# Altium PCB TIDM_TM4C129CAMERA.PcbDoc
Units mil, origin at the board's own origin, x right, y up, seen from the top; angles counter-clockwise.
Board outline 1800 x 2000 mil, 4 copper layers (Component Side, Ground Plane, Power Plane, Solder Side), stack 59.6 mil thick; 19 components, 33 nets, 138 pads, 33 vias.
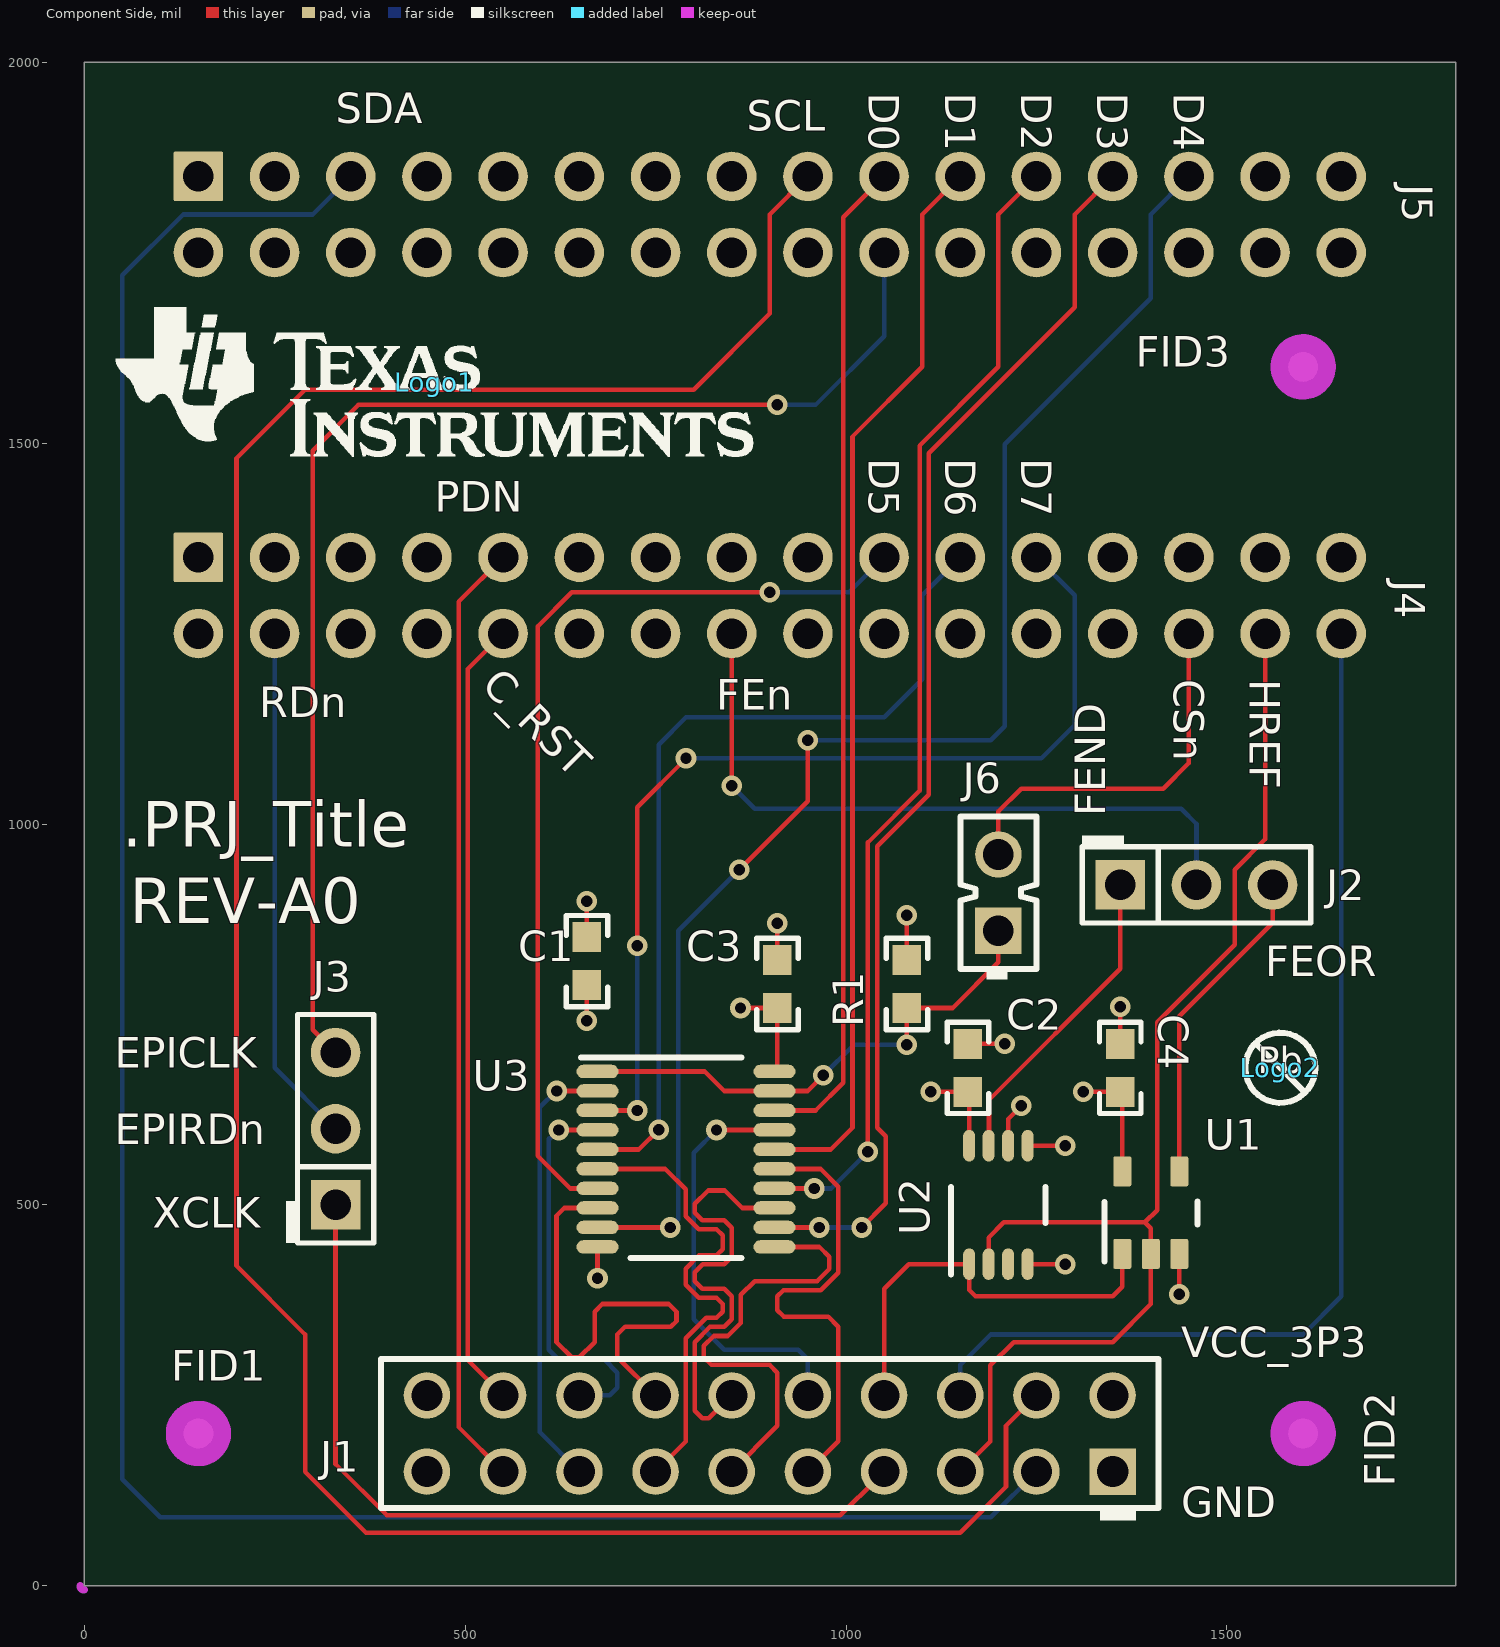
[diagram p0: Component Side view]
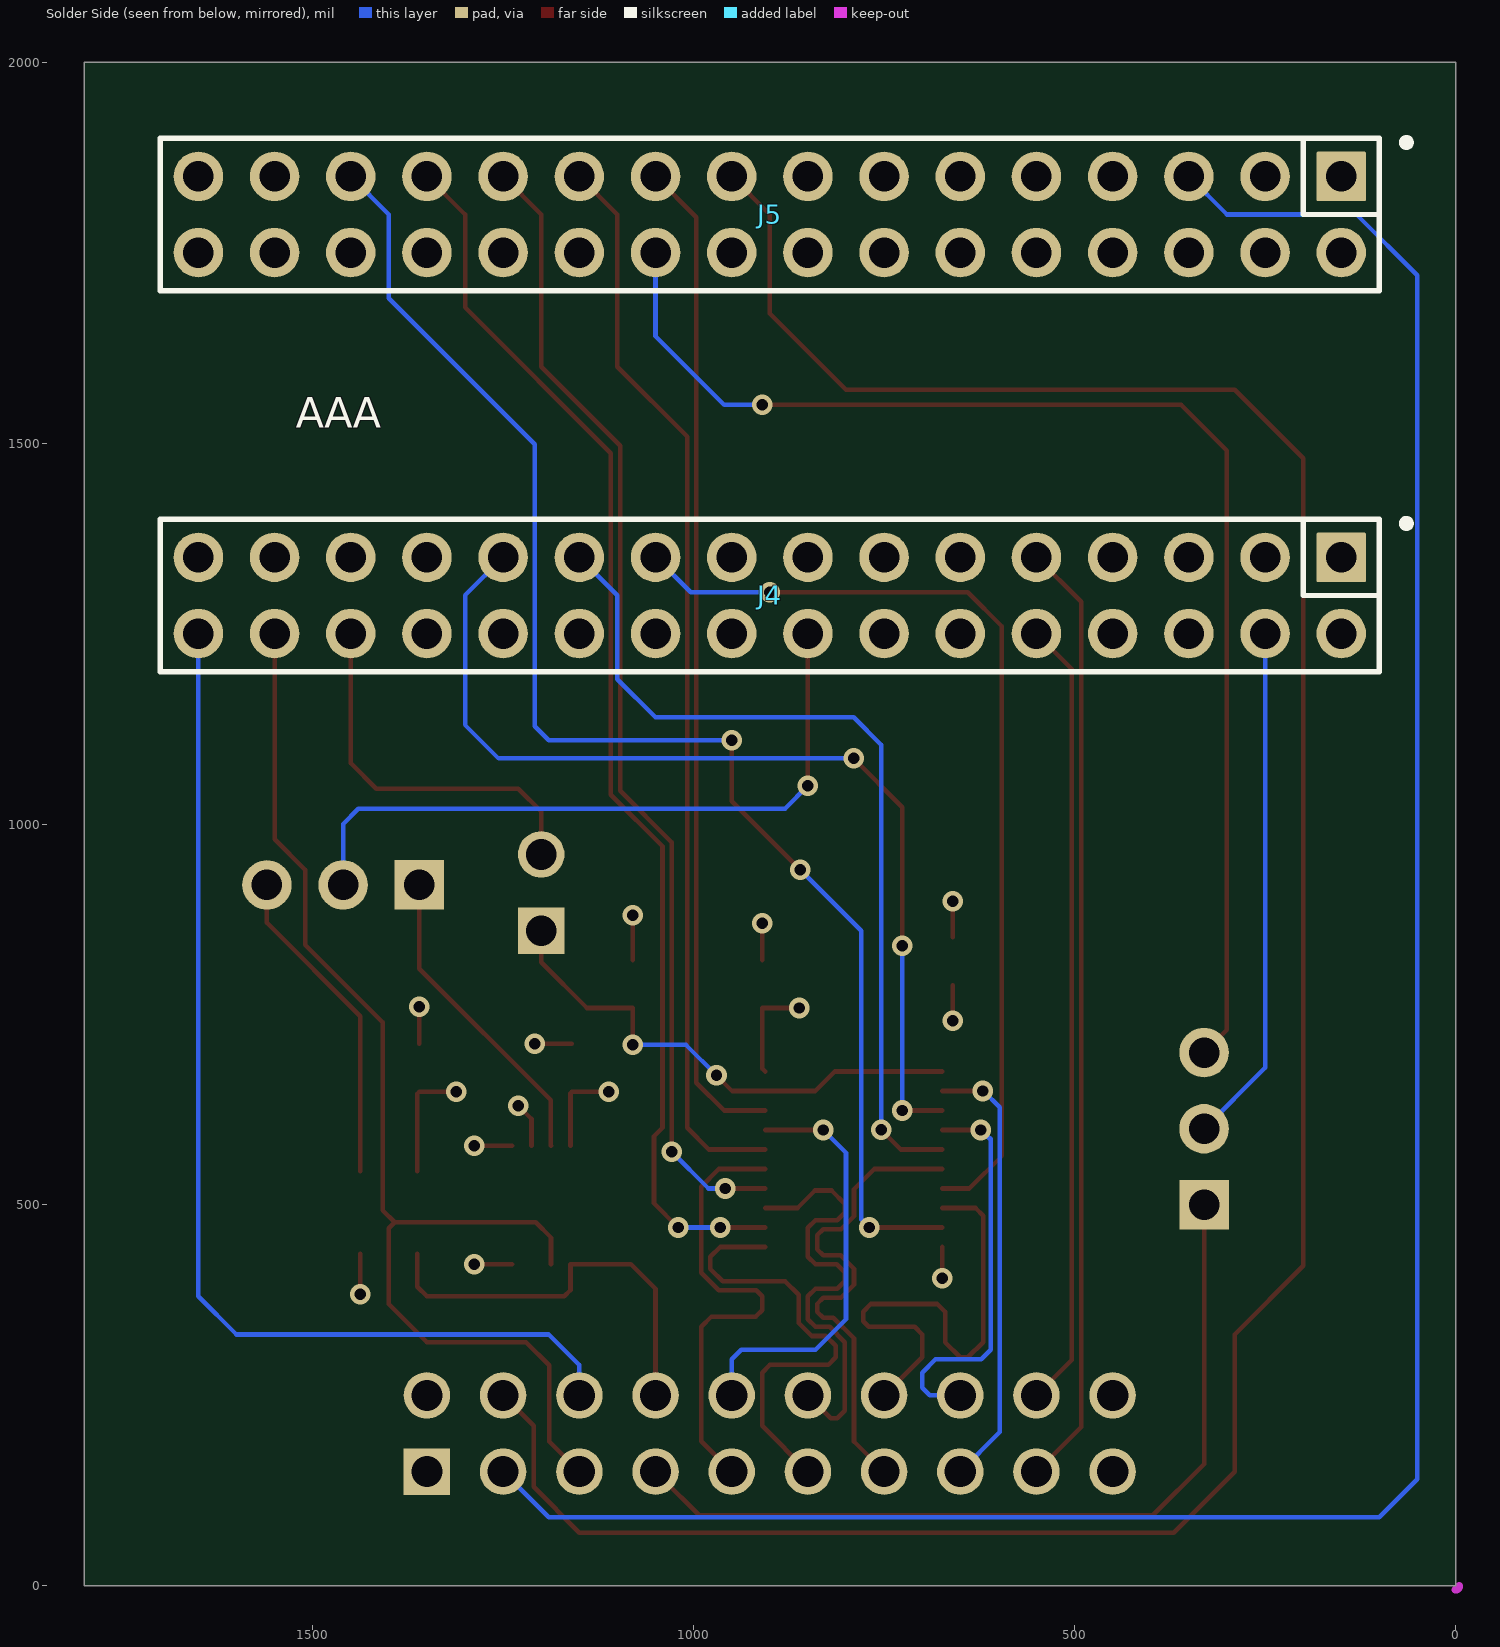
[diagram p1: Solder Side view, seen from below]
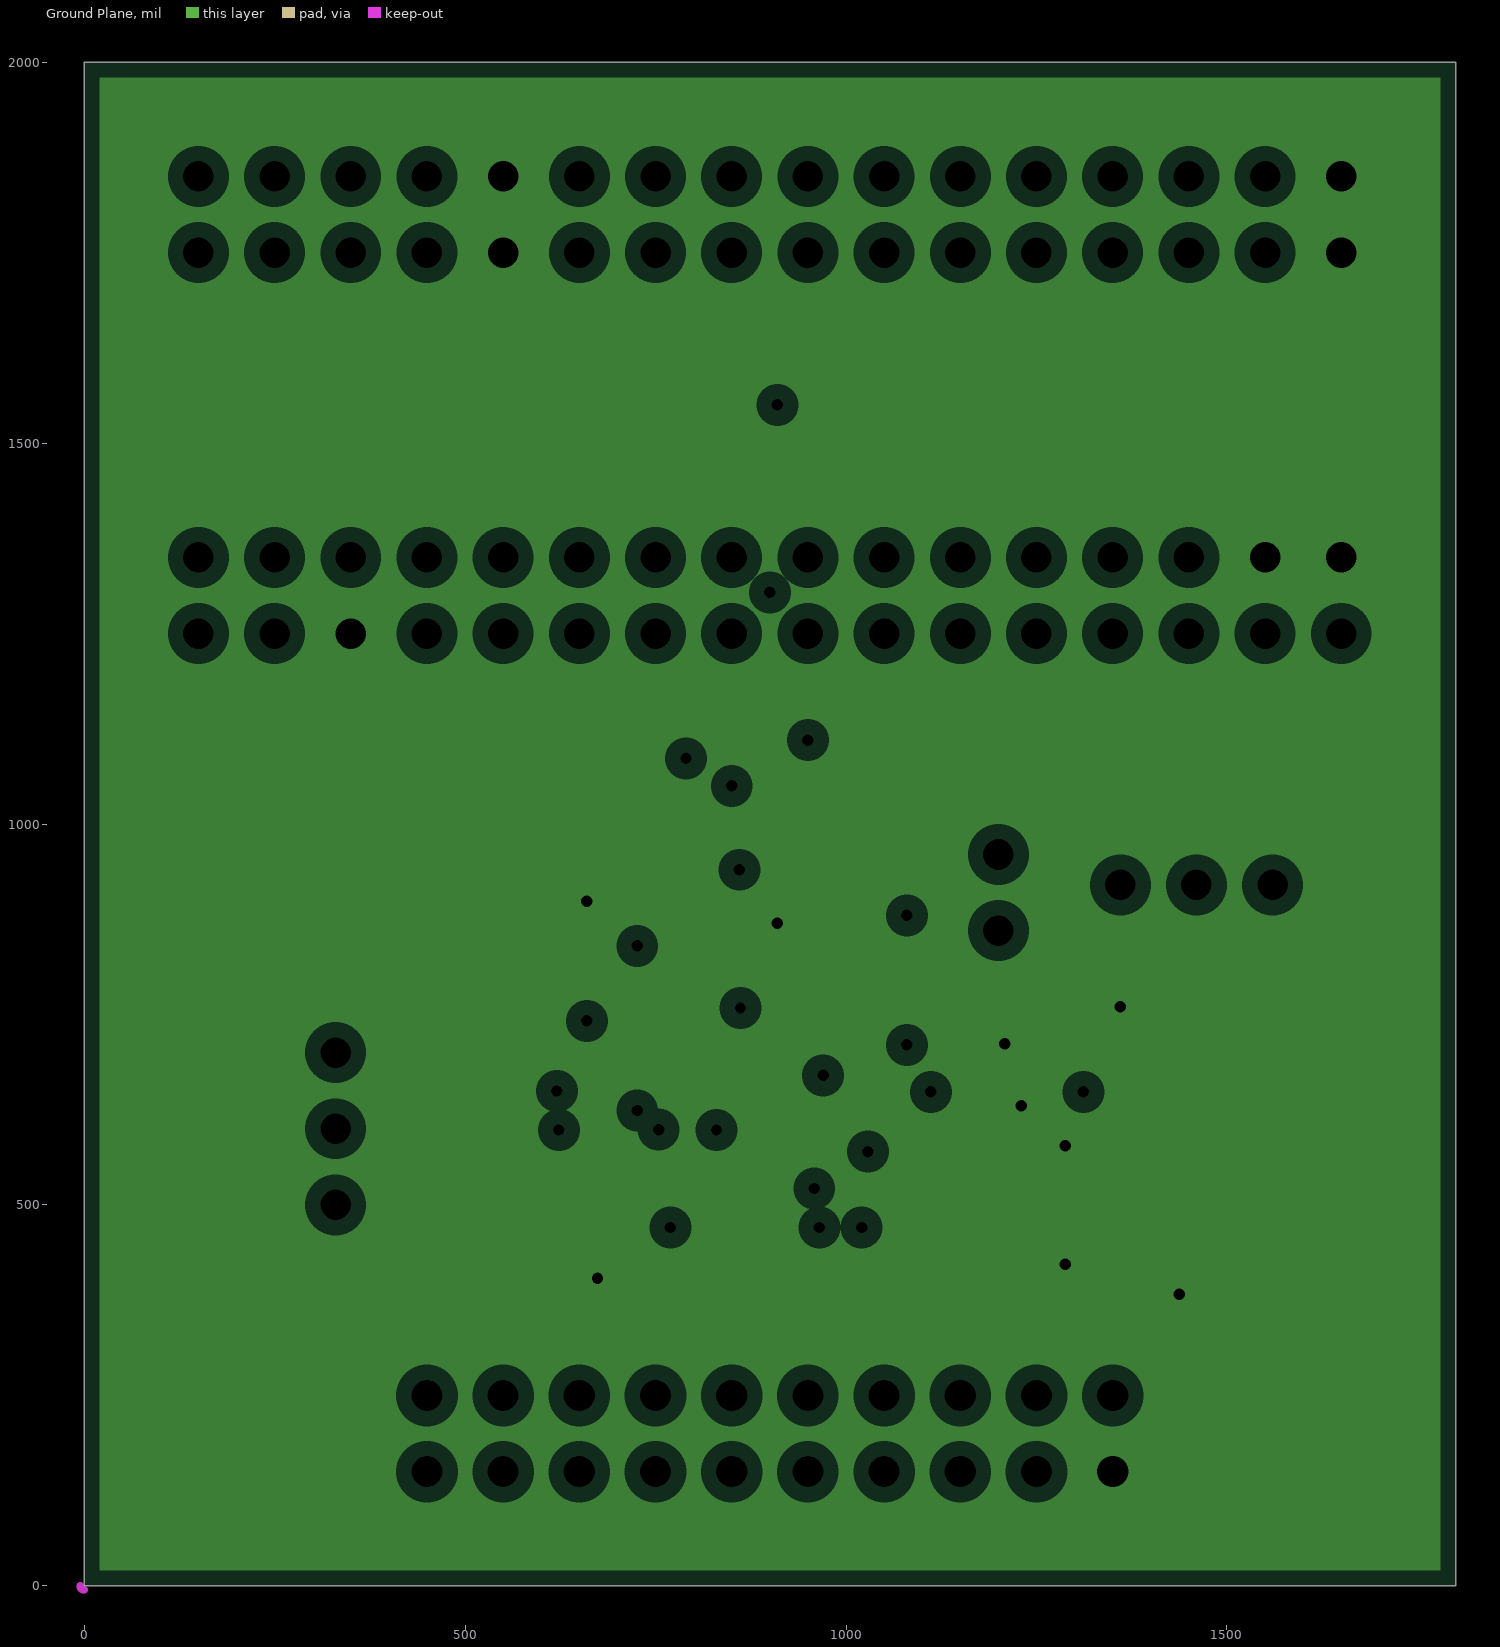
[diagram p2: Ground Plane, clearances drawn from the general rule]
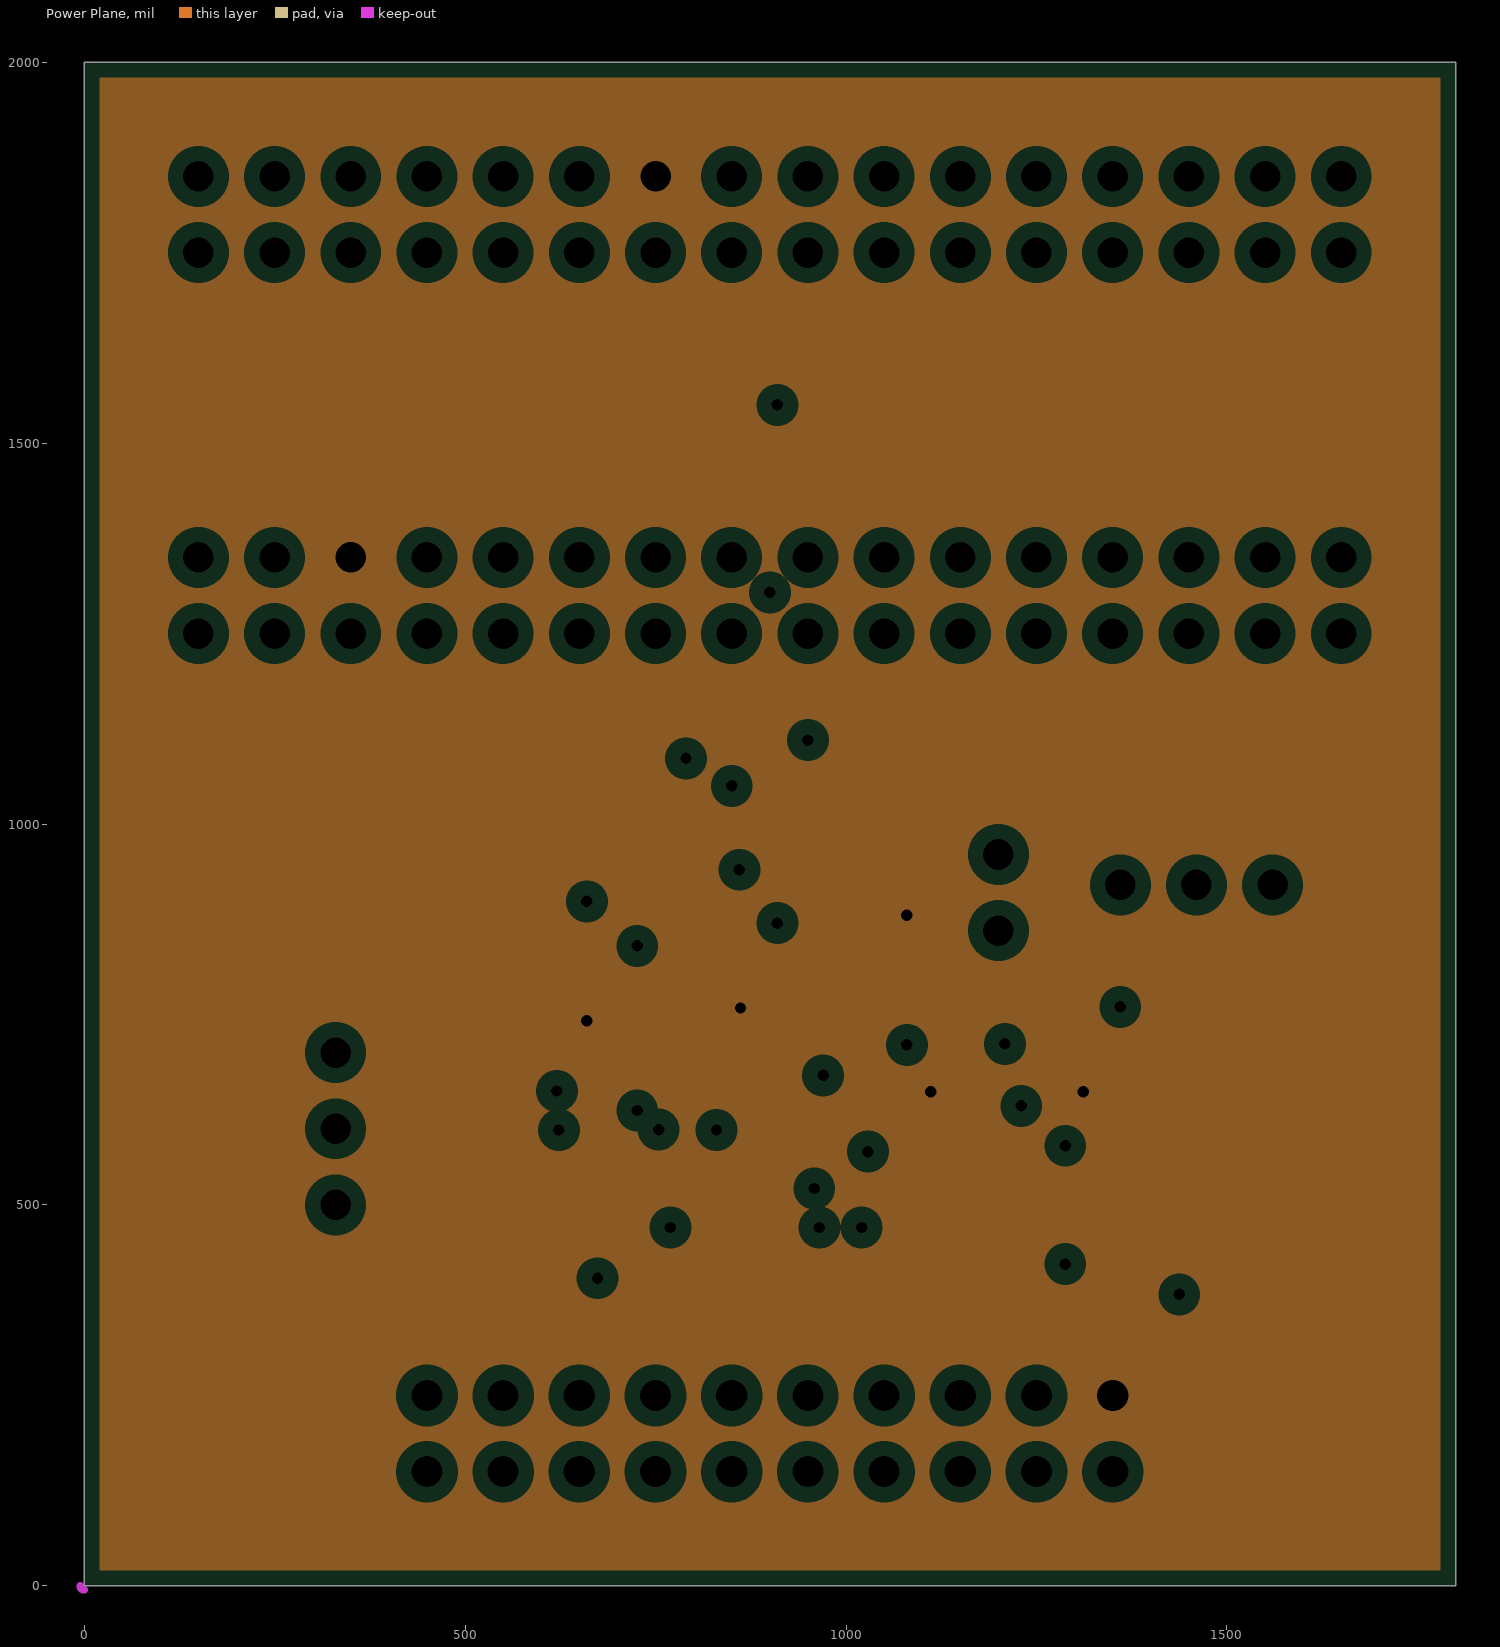
[diagram p3: Power Plane, clearances drawn from the general rule]
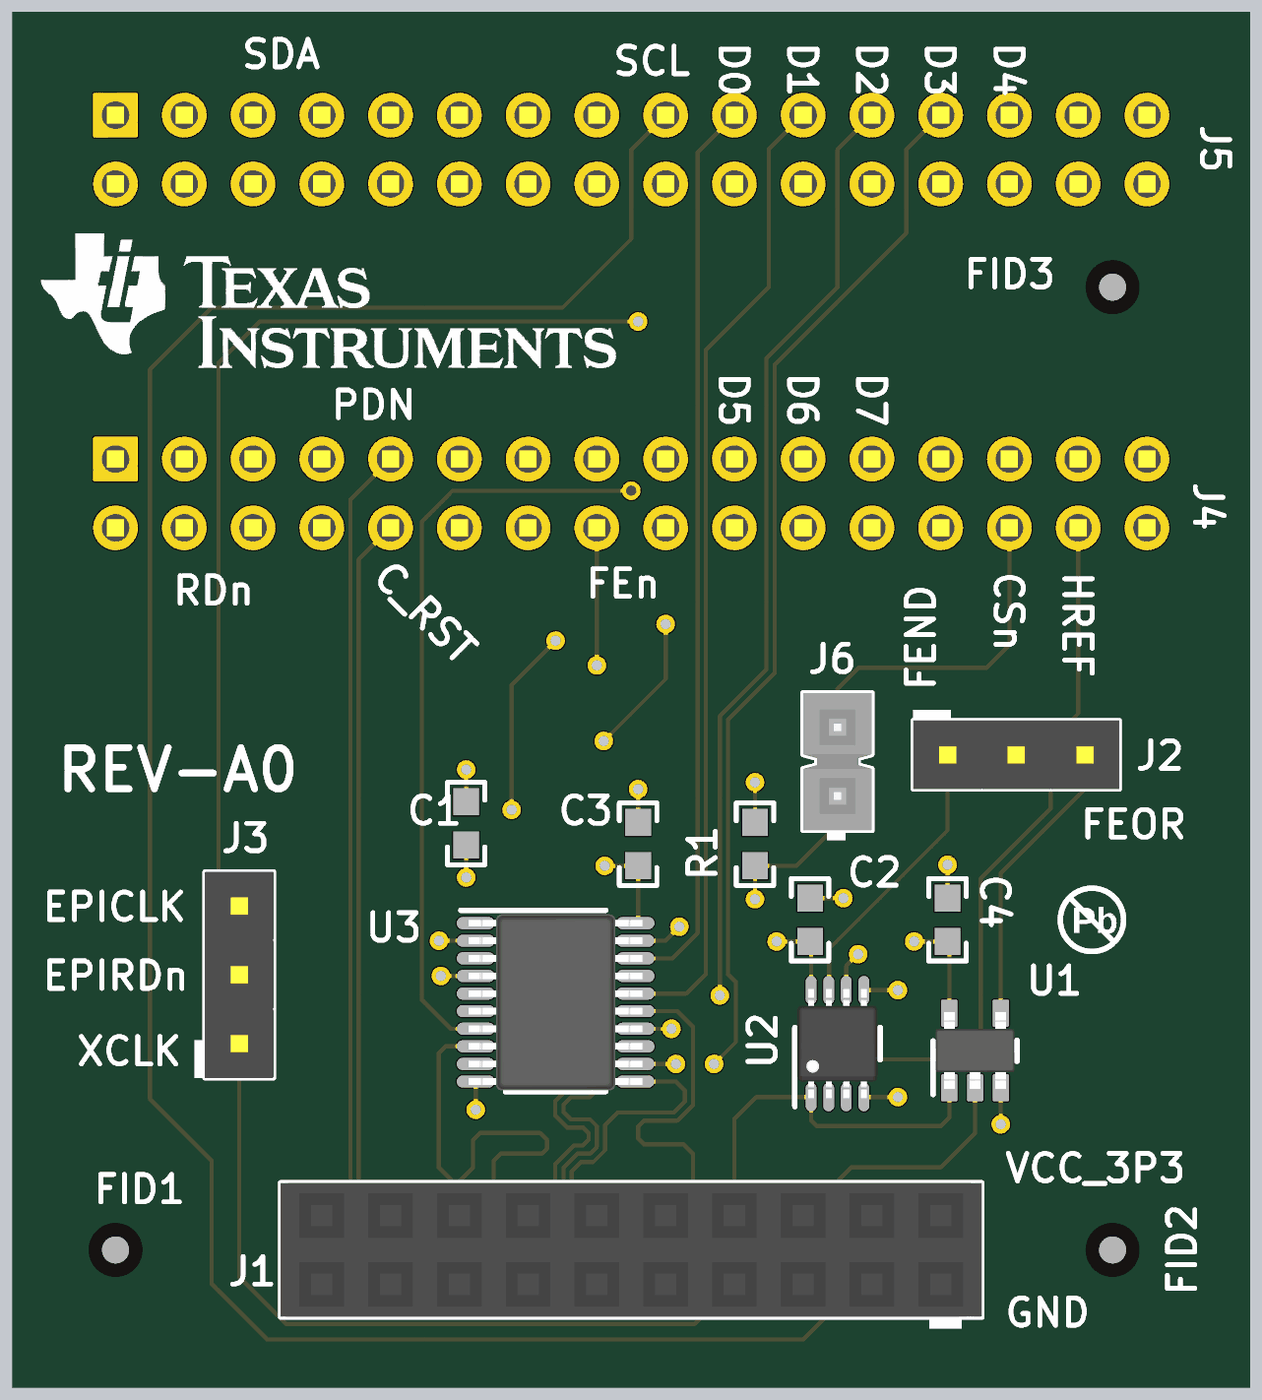
[diagram p4: 3D render of the assembled board from above, using the file's embedded part models]

## Layer stack, top to bottom
Top Solder: solder mask 0.4, Solder Resist, Dk 3.5
Component Side: signal copper 1.4
Dielectric 1: core 13, FR-4, Dk 4.8
Ground Plane: plane copper 1.4, net GND
Dielectric 3: prepreg 28, Dk 4.2
Power Plane: plane copper 1.4, net VCC_3P3
Dielectric 4: core 13, Dk 4.2
Solder Side: signal copper 1.4
Bottom Solder: solder mask 0.4, Solder Resist, Dk 3.5

## Board outline
0,0 0,2000 1800,2000 1800,0

## Design rules (kind name [scope] priority, off if disabled: settings)
AcuteAngle [All] p1: minimum=4.50000000000000E+0001 checktracksonly=FALSE
AssemblyTestPointUsage [All] p1: valid=2
Clearance Clearance_Keepouts [((IsTrack Or IsArc) And Not InPoly) And IsFree and IsKeepOut vs ((IsTrack Or IsArc) And Not InPoly) And IsFree and IsKeepOut] p1: gap=0
Clearance Clearance_BoardEdge_MountingHoles [OnCopper and InComponentClass('Mounting Holes') vs IsKeepOut] p2: gap=40
Clearance Clearance_BoardEdge_Poly [OnCopper and InPoly vs IsKeepOut] p3: gap=25
Clearance Clearance_BoardEdge [OnCopper and Not InComponentClass('Logo') and not InComponentClass('FiducialMark') and not InRegion(1000,500,4000,800) and Not IsKeepout vs IsKeepOut] p4: gap=75
Clearance Clearance_Poly [InPolygon] p5: gap=25
Clearance [All] p6: gap=6
ComponentClearance ComponentClearance_MountingHoles_FiducialMarks [InComponentClass('Mounting Holes') vs InComponentClass('FiducialMark')] p1: gap=50 collisioncheckmode=3 verticalgap=10 showdistances=FALSE
ComponentClearance ComponentClearance_Shunt [InComponentClass('Header') vs InComponentClass('Shunt')] p2: gap=0 collisioncheckmode=3 verticalgap=0 showdistances=FALSE
ComponentClearance ComponentClearance_Logo [InComponentClass('Logo')] p3: gap=50 collisioncheckmode=3 verticalgap=10 showdistances=FALSE
ComponentClearance ComponentClearance_ScrewToNut [(HasFootprint('NY PMS 440 0025 PH')) vs (HasFootprint('Keystone_1902C'))] p4: gap=5 collisioncheckmode=3 verticalgap=10 showdistances=FALSE
ComponentClearance ComponentClearance_MountingHoles [InComponentClass('Mounting Holes')] p5: gap=250 collisioncheckmode=3 verticalgap=100000 showdistances=FALSE
ComponentClearance ComponentClearance_SmallPassives [HasFootprint('0201*') or HasFootprint('0402*') or HasFootprint('0508') or HasFootprint('0603*') or HasFootprint('0612') or HasFootprint('0805*') or HasFootprint('0815*') or HasFootprint('0830*') or HasFootprint('1206*') or HasFootprint('1210*') or HasFootprint('1808*') or HasFootprint('1812*') or HasFootprint('1825*') or HasFootprint('2010*') or HasFootprint('2220*') or HasFootprint('2225*') or HasFootprint('2512*') or HasFootprint('2728*') or HasFootprint('3518*') vs HasFootprint('0201*') or HasFootprint('0402*') or HasFootprint('0508') or HasFootprint('0603*') or HasFootprint('0612') or HasFootprint('0805*') or HasFootprint('0815*') or HasFootprint('0830*') or HasFootprint('1206*') or HasFootprint('1210*') or HasFootprint('1808*') or HasFootprint('1812*') or HasFootprint('1825*') or HasFootprint('2010*') or HasFootprint('2220*') or HasFootprint('2225*') or HasFootprint('2512*') or HasFootprint('2728*') or HasFootprint('3518*')] p6: gap=20 collisioncheckmode=3 verticalgap=10 showdistances=FALSE
ComponentClearance ComponentClearance_THtoSMT [IsThruComponent vs IsSMTComponent] p7: gap=50 collisioncheckmode=3 verticalgap=30 showdistances=FALSE
ComponentClearance ComponentClearance_THtoTH [IsThruComponent vs IsThruComponent] p8: gap=50 collisioncheckmode=3 verticalgap=30 showdistances=FALSE
ComponentClearance [All] p9: gap=40 collisioncheckmode=3 verticalgap=10 showdistances=FALSE
DiffPairsRouting [All] p1: maxlimit=100 minlimit=10 mostfreqgap=10 toplayer_minwidth=15 toplayer_maxwidth=15 toplayer_prefwidth=15 bottomlayer_minwidth=15 bottomlayer_maxwidth=15 bottomlayer_prefwidth=15 maxuncoupledlength=1000
FabricationTestPointUsage TestPointUsage [All] p1: valid=2 allowmultiple=FALSE
FabricationTestpoint Testpoint [All] p1: side=3 testpointundercomponent=TRUE minsize=40 maxsize=100 preferedsize=60 minholesize=0 maxholesize=40 preferedholesize=32 testpointgrid=1 allowsidetop=TRUE allowsidebottom=TRUE usegrid=TRUE gridtolerance=0.01
FanoutControl Fanout_LCC [IsLCC] p1: bgadir=Out bgaviamode=Centered fanoutstyle=Auto fanoutdirection=Alternating viagrid=1 // Fanout_LCC (Default Rule)
FanoutControl Fanout_BGA [IsBGA] p2: bgadir=Out bgaviamode=Centered fanoutstyle=Auto fanoutdirection=Alternating viagrid=1 // Fanout_BGA (Default Rule)
FanoutControl Fanout_Default [All] p4: bgadir=Out bgaviamode=Centered fanoutstyle=Auto fanoutdirection=Alternating viagrid=1 // Fanout_Default (Default Rule)
FanoutControl Fanout_Small [(CompPinCount < 5)] p5: bgadir=Out bgaviamode=Centered fanoutstyle=Auto fanoutdirection=OutThenIn viagrid=1 // Fanout_Small (Default Rule)
HoleSize [All] p1: absolutevalues=TRUE maxlimit=251 minlimit=8 maxpercent=80.000 minpercent=20.000
MinimumAnnularRing MinimumAnnularRing_ThermalPadVias [IsVia and InAnyComponent] p1: minimumring=5.91
MinimumAnnularRing [All] p2: minimumring=6
MinimumSolderMaskSliver MinimumSolderMaskSliver_Logo [InComponentClass('Logo') vs InComponentClass('Logo')] p1: minsoldermaskwidth=0.7
MinimumSolderMaskSliver [All] p2: minsoldermaskwidth=3.93
PlaneClearance [All] p1: clearance=20
PlaneConnect [All] p1: planeconnectstyle=Relief reliefexpansion=13 reliefentries=4 reliefconductorwidth=10 reliefairgap=10
PolygonConnect [All] p1: connectstyle=Relief reliefconductorwidth=10 reliefentries=4 polygonreliefangle="90 Angle" airgapwidth=10
RoutingVias ThermalPadVias [IsVia and InAnyComponent] p1: holewidth=7.87 width=19.68 viastyle="Through Hole" minholewidth=7.87 minwidth=19.68 maxholewidth=12.99 maxwidth=23.62
RoutingVias [All] p2: holewidth=15 width=27 viastyle="Through Hole" minholewidth=10 minwidth=22 maxholewidth=15 maxwidth=27
SMDNeckDown [All] p1: percent=80.000
SilkToBoardRegionClearance [Not ((IsComment or IsDesignator) And (Hide <> 'False')) and not InRegion(1000,500,4000,800)] p1:
SilkToSilkClearance SilkToSilkClearance_Pb-FreeLogo [(HasFootprint('Pb-Free_Overlay_Medium') OR HasFootprint('Pb-Free_Overlay_Small')) vs (HasFootprint('Pb-Free_Overlay_Medium') OR HasFootprint('Pb-Free_Overlay_Small'))] p1: silktosilkclearance=0
SilkToSilkClearance [All] p2: silktosilkclearance=4
SilkToSolderMaskClearance SilkToComonentPadClearance [IsPad and InAnycomponent] p1: minsilkscreentomaskgap=5 clearancetoexposedcopper=TRUE
SilkToSolderMaskClearance "Silk to Solder Mask Opening" [All] p2: minsilkscreentomaskgap=4 clearancetoexposedcopper=FALSE
SolderMaskExpansion SolderMaskExpansionVia [IsVia] p1: expansion=-20
SolderMaskExpansion [All] p2: expansion=1.97
UnpouredPolygon [All] p1: allowunpoured=FALSE
Width [All] p1: maxlimit=10 minlimit=6 preferedwidth=6 checkconnectedcopper=TRUE
13 further rules are at their usual default settings.

## Classes and differential pairs
component class Header: J2 J3 J4 J5 J6
component class Logo: Logo1
component class FiducialMark: FID1 FID2 FID3

## Components (designator, comment, footprint, x,y, rotation, side; value= is the part's Value field where it differs from the comment)
C1 "GRM188R71A105KA61D" 0603 660,820 r90 top
C2 "C0603C104K8RACTU" 0603 1160,680 r90 top
C3 "C0603C104K8RACTU" 0603 910,790 r90 top
C4 "C0603C104K8RACTU" 0603 1360,680 r90 top
FID1 "Fiducial" Fiducial10-20 150,200 r0 top
FID2 "Fiducial" Fiducial10-20 1600,200 r0 top
FID3 "Fiducial" Fiducial10-20 1600,1600 r0 top
J1 "SSW-110-21-S-D" Samtec_SSW-110-x1-x-D 900,200 r180 top
J2 "TSW-103-07-G-S" TSW-103-07-G-S 1460,920 r0 top
J3 "TSW-103-07-G-S" TSW-103-07-G-S 330,600 r90 top
J4 "TSW-116-07-G-D" TSW-116-07-G-D 900,1300 r0 bottom
J5 "TSW-116-07-G-D" TSW-116-07-G-D 900,1800 r0 bottom
J6 "TSW-102-07-T-S" Samtec_TSW-102-07-T-S 1200,910 r90 top
Logo1 "Texas Instruments" TI_Stacked_Overlay_Small 460,1580 r0 top
Logo2 "Pb-Free Symbol" Pb-Free_Overlay_Small 1570,680 r0 top
R1 "CRCW060310K0JNEA" 0603 1080,790 r90 top
U1 "SN74LVC1G32QDBVRQ1" DBV0005A_N 1400,490 r90 top
U2 "SN74LVC2G00DCTR" DCT0008A_N 1200,500 r90 top
U3 "SN74ALVC244PWR" PW0020A_N 790,560 r0 top

## Footprints (in the part's own frame and the unit in brackets; to place one, negate y for a bottom-side part, rotate by r counter-clockwise, add the part's x,y. Pads: shape width x height; smd on the part's side, far side on the other; paste and mask are expansions set on the pad)
0603 [mm] "0603 from SM-752 data"
  rect 1x0.95 smd: 1(-0.8,0) 2(0.8,0)
  silkscreen extent -1.52,-0.69 1.52,0.69, body extent -0.87,-0.47 0.87,0.47, height 1
DBV0005A_N [mm] "SOT23, 5-Leads, Body 2.9x1.6mm, Pitch 0.95mm, Lead Span 2.8mm, IPC Medium Density"
  rrect17% 1x0.6 smd: 1(-1.375,0.95) 2(-1.375,0) 3(-1.375,-0.95) 4(1.375,-0.95) 5(1.375,0.95)
  silkscreen extent -1.63,-1.55 0.38,1.55, body extent -1.42,-1.46 1.42,1.46, height 1.09
DCT0008A_N [mm] "TSOP, 8-Leads, Body 3x2.8mm, Pitch 0.65mm, IPC Medium Density"
  oval 1.05x0.4 smd: 1(-1.975,0.975) 2(-1.975,0.325) 3(-1.975,-0.325) 4(-1.975,-0.975) 5(1.975,-0.975) 6(1.975,-0.325) 7(1.975,0.325) 8(1.975,0.975)
  silkscreen extent -2.32,-1.57 0.6,1.58, body extent -2.01,-1.47 2.01,1.48, height 1.3
Fiducial10-20 [mm]
  round 1 smd mask+0.5: 1(0,0)
  Component Side keep-out circle w1.178: c0,0 r0.5
Pb-Free_Overlay_Small [mil]
  silkscreen extent -46,-46 46,46
PW0020A_N [mm] "TSOP, 20-Leads, Body 6.5x4.4mm, Pitch 0.65mm, IPC Medium Density"
  oval 1.4x0.45 smd: 1(-2.95,2.925) 2(-2.95,2.275) 3(-2.95,1.625) 4(-2.95,0.975) 5(-2.95,0.325) 6(-2.95,-0.325) 7(-2.95,-0.975) 8(-2.95,-1.625) 9(-2.95,-2.275) 10(-2.95,-2.925) 11(2.95,-2.925) 12(2.95,-2.275) 13(2.95,-1.625) 14(2.95,-0.975) 15(2.95,-0.325) 16(2.95,0.325) 17(2.95,0.975) 18(2.95,1.625) 19(2.95,2.275) 20(2.95,2.925)
  silkscreen extent -3.5,-3.3 1.85,3.4, body extent -3.21,-3.25 3.21,3.25, height 1
Samtec_SSW-110-x1-x-D [mm] "Receptacle, 2.54mm, 10x2, TH"
  rect 1.55x1.55 hole 1.04: 1(-11.43,1.27)
  round 1.55 hole 1.04: 2(-11.43,-1.27) 3(-8.89,1.27) 4(-8.89,-1.27) 5(-6.35,1.27) 6(-6.35,-1.27) 7(-3.81,1.27) 8(-3.81,-1.27) 9(-1.27,1.27) 10(-1.27,-1.27) 11(1.27,1.27) 12(1.27,-1.27) 13(3.81,1.27) 14(3.81,-1.27) 15(6.35,1.27) 16(6.35,-1.27) 17(8.89,1.27) 18(8.89,-1.27) 19(11.43,1.27) 20(11.43,-1.27)
  silkscreen extent -12.95,-2.48 12.95,2.9, body extent -12.95,-2.48 12.95,2.48, height 8.51
Samtec_TSW-102-07-T-S [mm] "Header, 2.54 mm, 2x1, Tin, TH"
  rect 1.55x1.55 hole 1.02: 1(-1.27,0)
  round 1.55 hole 1.02: 2(1.27,0)
  silkscreen extent -2.9,-1.27 2.54,1.27, body extent -2.54,-1.27 2.54,1.27, height 8.38
TI_Stacked_Overlay_Small [mil]
  silkscreen extent -418,-98 418,98
TSW-103-07-G-S [mm] "Samtec 100mil, 1x3, 230 mil above insulator"
  rect 1.65x1.65 hole 1.016: 1(-2.54,0)
  round 1.65 hole 1.016: 2(0,0) 3(2.54,0)
  silkscreen extent -3.81,-1.27 3.81,1.65, body extent -3.81,-1.27 3.81,1.27, height 8.38
TSW-116-07-G-D [mm] "Samtec 100mil, 2x16, 230 mil above insulator"
  rrect6% 1.65x1.65 hole 1.016: 1(-19.05,-1.27)
  round 1.65 hole 1.016: 2(-19.05,1.27) 3(-16.51,-1.27) 4(-16.51,1.27) 5(-13.97,-1.27) 6(-13.97,1.27) 7(-11.43,-1.27) 8(-11.43,1.27) 9(-8.89,-1.27) 10(-8.89,1.27) 11(-6.35,-1.27) 12(-6.35,1.27) 13(-3.81,-1.27) 14(-3.81,1.27) 15(-1.27,-1.27) 16(-1.27,1.27) 17(1.27,-1.27) 18(1.27,1.27) 19(3.81,-1.27) 20(3.81,1.27) 21(6.35,-1.27) 22(6.35,1.27) 23(8.89,-1.27) 24(8.89,1.27) 25(11.43,-1.27) 26(11.43,1.27) 27(13.97,-1.27) 28(13.97,1.27) 29(16.51,-1.27) 30(16.51,1.27) 31(19.05,-1.27) 32(19.05,1.27)
  silkscreen extent -21.34,-2.54 20.32,2.54, body extent -20.32,-2.54 20.32,2.54, height 8.38

## Part data
C1: "CAP, CERM, 1 µF, 10 V, +/- 10%, X7R, 0603"
C2 C3 C4: "CAP, CERM, 0.1 µF, 10 V, +/- 10%, X7R, 0603"
FID1 FID2 FID3: "Fiducial mark.  There is nothing to buy or mount."
J1: "Receptacle, 2.54mm, 10x2, Gold, TH"
J2 J3: "Header, 100mil, 3x1, Gold, TH"
J4 J5: "Header, 100mil, 16x2, Gold, TH"
J6: "Header, 2.54 mm, 2x1, Tin, TH"
Logo1: library part TI_Logo, "Texas Instrument Corporate Signature"
Logo2: library part Pb-Free
R1: "RES, 10 k, 5%, 0.1 W, 0603"
U1: "SINGLE 2-INPUT POSITIVE-OR GATE, DBV0005A"
U2: "Dual 2-Input Positive-NAND Gate, DCT0008A"
U3: "OCTAL BUFFER/DRIVER WITH 3-STATE OUTPUTS, PW0020A"

## Via types
v1: diameter 27, hole 15, Component Side to Solder Side, 33 vias

## Nets (pads, with @x,y where several pads share a name; then routed paths per layer and width w, separated by ;. In a path a pad name is that pad's centre, name@x,y a point inside that pad or via, vN(x,y) a via of type N, cw(c..) or ccw(c..) an arc to the next point about the centre after c; other vN are vias at no path point)
C_RST: J1.18 J4.10 | length 1038.5
  Component Side w6: J1.18 503.48,296.52 503.48,1203.48 J4.10
EPI0CLK: J3.3 J5.20 | length 1724.6
  Component Side w6: J3.3 300,730 300,1490 360,1550 v1(910,1550)
  Solder Side w6: v1(910,1550) 960,1550 1050,1640 J5.20
EPI0CSN: J4.28 J6.2 | length 502.8
  Component Side w6: J6.2 1200,1016.47 1230,1046.47 1416.47,1046.47 1450,1080 J4.28
EPI0D0: J5.19 U3.18 | length 1317.2
  Component Side w6: U3.18 960,623.98 996.52,660.5 996.52,1796.52 J5.19
EPI0D1: J5.21 U3.16 | length 1421.5
  Component Side w6: U3.16 980,572.8 1008.52,601.32 1008.52,1508.52 1100,1600 1100,1800 J5.21
EPI0D2: J5.23 U3.14 | length 1514.3
  Component Side w6: U3.14 v1(958.39,521.61) ; v1(1028.82,570) 1028.82,975.79 1096.52,1043.49 1096.52,1496.52 1200,1600 1200,1800 J5.23
  Solder Side w6: v1(958.39,521.61) 980.43,521.61 v1(1028.82,570)
EPI0D3: J5.25 U3.12 | length 1638.8
  Component Side w6: U3.12 v1(965,470.43) ; v1(1020.43,470.43) 1052,502 1052,590 1040.82,601.18 1040.82,970.82 1108.52,1038.52 1108.52,1486.52 1300,1678 1300,1800 J5.25
  Solder Side w6: v1(965,470.43) v1@1019.57,470.43
EPI0D4: J5.27 U3.9 | length 1897.7
  Component Side w6: U3.9 v1(769.57,470.43) ; v1(860,940) 950,1030 v1(950,1110)
  Solder Side w6: v1(769.57,470.43) 780,480.87 780,860 v1(860,940) ; v1(950,1110) 1190,1110 1208.52,1128.52 1208.52,1498.52 1400,1690 1400,1800 J5.27
EPI0D5: J4.19 U3.7 | length 1283.5
  Component Side w6: U3.7 638,521.61 595.3,564.32 595.3,1259.3 640,1304 v1(900,1304)
  Solder Side w6: v1(900,1304) 1004,1304 J4.19
EPI0D6: J4.21 U3.5 | length 1158.4
  Component Side w6: U3.5 728,572.8 v1(754,598.8)
  Solder Side w6: v1(754,598.8) 754,1104 790,1140 1050,1140 1100,1190 1100,1300 J4.21
EPI0D7: J4.23 U3.3 | length 1309.6
  Component Side w6: U3.3 v1(726.02,623.98) ; v1(726.02,840) 726.02,1022.05 v1(790,1086.02)
  Solder Side w6: v1(726.02,623.98) v1(726.02,840) ; v1(790,1086.02) 1256.02,1086.02 1300,1130 1300,1300 J4.23
EPI0FEMPTY: J2.2 J4.16 | length 910.7
  Component Side w6: v1(850,1050) J4.16
  Solder Side w6: v1(850,1050) 880,1020 1440,1020 1460,1000 J2.2
EPI0RDN: J3.2 J4.4 | length 703.1
  Solder Side w6: J4.4 250,680 J3.2 J3.2@310,600
FEMPT1: J2.1 U2.7 | length 413.8
  Component Side w6: U2.7 1187.7,578.25 1187.7,637.7 1360,810 J2.1
FEMPT2: J2.3 U1.4 | length 426.6
  Component Side w6: U1.4 1437.4,747.56 1560,870.16 J2.3
GND: C1.2 C2.2 C3.2 C4.2 J1.1 J4.6 J4.29 J4.31 J5.9 J5.10 J5.31 J5.32 U1.3 U2.4 U2.5 U2.6 U3.10 | length 444.9
  Component Side w6: C1.2 v1(660,898.5) ; v1(673.86,403.86) U3.10 ; C3.2 v1(910,870) ; C2.2 v1(1208.5,711.5) ; U2.6 1212.8,612.8 v1(1230,630) ; U2.4 v1(1287.76,422.24) ; U2.5 v1(1287.76,577.76) ; C4.2 v1(1360,760) ; v1(1437.4,382.6) U1.3
HREF: J1.5 J4.30 U1.2 U2.2 | length 1596.5
  Component Side w6: J1.5 1189.51,189.51 1189.51,289.51 1220,320 1350,320 1400,370 U1.2 1400,469.41 1392.26,477.16 ; U2.2 1187.2,457.2 1207.16,477.16 1392.26,477.16 ; J4.30 1550,980 1510,940 1510,841.73 1408.27,740 1408.27,493.17 1392.26,477.16
I2C4SCL: J1.4 J5.17 | length 3461.2
  Component Side w6: J5.17 900,1800 900,1670 800,1570 290,1570 200,1480 200,420 290,330 290,150 370,70 1150,70 1210,130 1210,210 J1.4
I2C4SDA: J1.3 J5.5 | length 3179.4
  Solder Side w6: J5.5 300,1800 130,1800 50,1720 50,140 100,90 1190,90 J1.3
NetJ6_1: J6.1 R1.1 U3.1 U3.19 | length 676.6
  Component Side w6: U3.1 814.84,675.16 840.43,649.57 U3.19 949.57,649.57 v1(970,670) ; v1(1080,710) R1.1 1140,758.5 1200,818.5 J6.1
  Solder Side w6: v1(970,670) 1010,710 v1(1080,710)
PCLK: J1.8 U1.1 U2.1 | length 551.8
  Component Side w6: J1.8 1050,390 1082.24,422.24 U2.1 1161.61,388.39 1170,380 1350,380 1362.6,392.6 U1.1
PWRDN: J1.17 J4.9 | length 1248.5
  Component Side w6: J1.17 491.48,208.52 491.48,1291.48 J4.9
VCC_3P3: C1.1 C2.1 C3.1 C4.1 J1.2 J4.5 J5.13 R1.2 U1.5 U2.8 U3.20 | length 506.9
  Component Side w6: v1(660,741.5) C1.1 ; v1(861.5,758.5) C3.1 910,679.02 U3.20 ; R1.2 v1(1080,880) ; v1(1111.5,648.5) C2.1 ; U2.8 C2.1@1161.61,646.89 ; v1(1311.5,648.5) C4.1 ; U1.5 C4.1@1362.6,645.91
VSYNC: J1.6 J4.32 | length 1447.3
  Solder Side w6: J1.6 1150,290 1190,330 1600,330 1650,380 J4.32
XCLK: J1.7 J3.1 | length 1099.8
  Component Side w6: J3.1 330,160 397.5,92.5 992.5,92.5 J1.7@1041.51,141.51
Y2: J1.15 U3.2 | length 584.3
  Component Side w6: v1(620.43,649.57) U3.2
  Solder Side w6: v1(620.43,649.57) 619.57,649.57 598,628 598,202 J1.15
Y3: J1.16 U3.4 | length 543.1
  Component Side w6: v1@621.61,598.39 v1(623.11,598.39) U3.4 ; J1.16@630,250 J1.16
  Solder Side w6: 610.75,587.52 610,586.77 610,310 622.5,297.5 682.5,297.5 700,280 700,260 690,250 J1.16 ; 611.49,586.77 v1(623.11,598.39)
Y4: J1.13 U3.6 | length 642.7
  Component Side w6: U3.6 762.8,547.2 789.51,520.49 789.51,485.03 806.54,468 830,468 838,460 838,442.05 830,434.05 807.08,434.05 789.51,416.48 789.51,395.03 806.54,378 830,378 838,370 838,360 830,352 816.54,352 789.51,324.97 789.51,189.51 J1.13
Y5: J1.14 U3.8 | length 644.4
  Component Side w6: U3.8 630,496.02 620,486.02 620,320 640,300 650,300 670,320 670,360 680,370 767.51,370 777.51,360 777.51,347.51 770,340 710,340 700,330 700,300 J1.14
Y6: J1.11 U3.11 | length 595.8
  Component Side w6: J1.11 910,210 910,280 900,290 823.51,290 813.51,300 813.51,315.03 826.48,328 844.97,328 862,345.03 862,382 880,400 962,400 978,416 978,432 965.16,444.84 U3.11
Y7: J1.12 U3.13 | length 598.9
  Component Side w6: J1.12 820,220 811.51,220 801.51,230 801.51,320 821.51,340 840,340 850,350 850,380 840,390 811.51,390 801.51,400 801.51,411.51 812.05,422.05 840,422.05 850,432.05 850,470 840,480 811.51,480 801.51,490 801.51,501.51 819,519 840.7,519 863.67,496.02 U3.13
Y8: J1.9 U3.15 | length 613
  Component Side w6: U3.15 966.8,547.2 990,524 990,411.03 966.97,388 918,388 910,380 910,362 918.49,353.51 976.49,353.51 990,340 990,190 J1.9
Y9: J1.10 U3.17 | length 556.2
  Component Side w6: v1(830,598.39) U3.17
  Solder Side w6: v1(830,598.39) 800,568.39 800,350 840,310 937.5,310 950,297.5 J1.10
pads on no net: FID1.1 FID2.1 FID3.1 J1.19 J1.20 J4.1 J4.2 J4.3 J4.7 J4.8 J4.11 J4.12 J4.13 J4.14 J4.15 J4.17 J4.18 J4.20 J4.22 J4.24 J4.25 J4.26 J4.27 J5.1 J5.2 J5.3 J5.4 J5.6 J5.7 J5.8 J5.11 J5.12 J5.14 J5.15 J5.16 J5.18 J5.22 J5.24 J5.26 J5.28 J5.29 J5.30 U2.3

## Polygon pours and split planes (outlines as drawn)
GND on Ground Plane (split plane): 1779.9,20.1 20.1,20.1 20.1,1979.9 1779.9,1979.9
VCC_3P3 on Power Plane (split plane): 1779.9,20.1 20.1,20.1 20.1,1979.9 1779.9,1979.9

## Keep-outs
Keep-Out Layer:
  lines w10: -5,0 ccw(c0,0) 0,-5 cw(c0,0) -5,0 ; 4950,-5 ccw(c4950,0) 4955,0 cw(c4950,0) 4950,-5
  text ".Layer_Name" at 578,-857.99 h60

## Other copper
Component Side:
  text ".Layer_Name" at 578,-857.99 h60
Solder Side:
  text ".Layer_Name" at 578,-857.99 h60
Ground Plane (plane layer: these items are gaps in the copper):
  text ".Layer_Name" at 578,-857.99 h60
Power Plane (plane layer: these items are gaps in the copper):
  text ".Layer_Name" at 578,-857.99 h60

## Silkscreen, mask and mechanical layers (free items; w line width, h text height)
Top Overlay:
  text "D0" at 1030,1960 h40 r270
  text "D1" at 1130,1960 h40 r270
  text "D2" at 1230,1960 h40 r270
  text "D3" at 1330,1960 h40 r270
  text "D4" at 1430,1960 h40 r270
  text "SDA" at 330,1920 h40
  text "SCL" at 870,1910 h40
  text "D5" at 1030,1480 h40 r270
  text "D6" at 1130,1480 h40 r270
  text "D7" at 1230,1480 h40 r270
  text "PDN" at 460,1410 h40
  text "CSn" at 1430,1190 h40 r270
  text "HREF" at 1530,1190 h40 r270
  text "C_RST" at 520,1180 h40 r315
  text "FEn" at 830,1150 h40
  text "RDn" at 230,1140 h40
  text "FEND" at 1340,1010 h40 r90
  text ".PRJ_Title" at 50,970 h60
  text "REV-A0" at 60,870 h60
  text "FEOR" at 1550,800 h40
  text "EPICLK" at 40,680 h40
  text "EPIRDn" at 40,580 h40
  text "XCLK" at 90,470 h40
  text "VCC_3P3" at 1440,300 h40
  text "GND" at 1440,90 h40
  text ".Layer_Name" at 578,-857.99 h60
Bottom Overlay:
  text "AAA" at 1410,1520 h40
  text ".Layer_Name" at 578,-857.99 h60
Top Paste:
  text ".Layer_Name" at 578,-857.99 h60
Bottom Paste:
  text ".Layer_Name" at 578,-857.99 h60
Top Solder:
  text ".Layer_Name" at 578,-857.99 h60
  text ".Layer_Name" at 578,-857.99 h60
Bottom Solder:
  text ".Layer_Name" at 578,-857.99 h60
Drill Guide:
  text ".Layer_Name" at 578,-857.99 h60
Mechanical 1:
  the board outline again, w10
Mechanical 2:
  rectangle: 1,-274.5 126,-149.5
  rectangle: 126,-399.5 501,-274.5
  rectangle: 125,-400 500,-275
  rectangle: 0,-275 125,-150
  lines w7: 0,-275 1000,-275 ; 1,-274.5 1001,-274.5 ; 125,-400 125,-150 ; 126,-399.5 126,-149.5 ; 250,-400 250,-150 ; 251,-399.5 251,-149.5 ; 500,-400 500,-150 ; 501,-399.5 501,-149.5 ; 750,-400 750,-150 ; 751,-399.5 751,-149.5 ; 0,-400 0,-150 1000,-150 1000,-400 0,-400 ; 1,-399.5 1001,-399.5 1001,-149.5 1,-149.5 1,-399.5
  text ".Layer_Name" at 578,-857.99 h60
  text ".Layer_Name" at 578,-857.99 h60
Mechanical 3:
  text ".Layer_Name" at 578,-857.99 h60
  text ".Layer_Name" at 578,-857.99 h60
Mechanical 4:
  text ".Layer_Name" at 578,-857.99 h60
  text ".Layer_Name" at 578,-857.99 h60
Mechanical 5:
  lines w10: -292,-930.17 6308,-930.17 ; -292,-726.83 6310,-726.83 ; -292,-523.5 -292,-1133.5 3713,-1133.5 6310,-1133.5 6310,-523.5 -291.5,-523.5 -291.5,-1133.5 1284,-1133.5 ; -291,-929.67 6309,-929.67 ; -291,-726.33 6311,-726.33 ; -291,-523 -291,-1133 3714,-1133 6311,-1133 6311,-523 -290.5,-523 -290.5,-1133 1285,-1133 ; 2173,-1133.5 2173,-523.5 ; 2174,-1133 2174,-523 ; 3440,-726.83 3440,-523.5 ; 3441,-726.33 3441,-523 ; 4280,-726.83 4280,-523.5 ; 4281,-726.33 4281,-523 ; 4902,-1140 4902,-937.17 ; 4903,-1139.5 4903,-936.67
  text "COMPONENTS MARKED 'DNP' SHOULD NOT BE POPULATED." at 1153.5,-318.5 h60
  text "COMPONENTS MARKED 'DNP' SHOULD NOT BE POPULATED." at 1154.5,-318 h60
  text "ASSEMBLY VARIANT:" at 1153,-434 h60
  text "ASSEMBLY VARIANT:" at 1154,-433.5 h60
  text ".VariantName" at 2189,-434 h60
  text ".VariantName" at 2190,-433.5 h60
  text "PCB VIEWED FROM TOP SIDE" at -227.5,-655.17 h60
  text "BOARD #:" at 2249,-655.17 h60
  text ".PRJ_Number" at 2794.5,-655.17 h60
  text "REV:" at 3639,-655.17 h60
  text ".PCB_Rev" at 3930.5,-655.17 h60
  text "SVN REV:" at 4477,-655.17 h60
  text ".VersionControl_RevNumber" at 4983,-655.17 h60
  text "PCB VIEWED FROM TOP SIDE" at -228.5,-655.67 h60
  text "BOARD #:" at 2248,-655.67 h60
  text ".PRJ_Number" at 2793.5,-655.67 h60
  text "REV:" at 3638,-655.67 h60
  text ".PCB_Rev" at 3929.5,-655.67 h60
  text "SVN REV:" at 4476,-655.67 h60
  text ".VersionControl_RevNumber" at 4982,-655.67 h60
  text "LAYER NAME =" at -227.5,-857.99 h60
  text "TID #:" at 2248,-859 h60
  text "TID #:" at 2249,-858.5 h60
  text ".TID" at 2793.5,-859 h60
  text ".TID" at 2794.5,-858.5 h60
  text "PLOT NAME =" at -228.5,-1064.34 h60
  text "PLOT NAME =" at -227.5,-1063.84 h60
  text ".plot_File_Name" at 577,-1064.34 h60
  text ".plot_File_Name" at 578,-1063.84 h60
  text "GENERATED    :" at 2250,-1064.34 h60
  text "GENERATED    :" at 2251,-1063.84 h60
  text ".Print_Date" at 3119.5,-1064.34 h60
  text ".Print_Date" at 3120.5,-1063.84 h60
  text ".Print_Time" at 3848.5,-1064.34 h60
  text ".Print_Time" at 3849.5,-1063.84 h60
  text "TEXAS INSTRUMENTS" at 5113,-1064.34 h60
  text "TEXAS INSTRUMENTS" at 5114,-1063.84 h60
Mechanical 6:
  lines w10: -292.5,-727.33 6309.5,-727.33 ; -291.5,-726.83 6310.5,-726.83 ; -290.5,-930.67 6309.5,-930.67 ; -289.5,-930.17 6310.5,-930.17 ; 1115.5,-1140.5 1115.5,-937.67 ; 1116.5,-1140 1116.5,-937.17 ; 1737.5,-727.33 1737.5,-524 ; 1738.5,-726.83 1738.5,-523.5 ; 2577.5,-727.33 2577.5,-524 ; 2578.5,-726.83 2578.5,-523.5 ; 3844.5,-1134 3844.5,-524 ; 3845.5,-1133.5 3845.5,-523.5 ; 4733.5,-1134 6309,-1134 6309,-524 -292.5,-524 -292.5,-1134 2304.5,-1134 6309.5,-1134 6309.5,-524 ; 4734.5,-1133.5 6310,-1133.5 6310,-523.5 -291.5,-523.5 -291.5,-1133.5 2305.5,-1133.5 6310.5,-1133.5 6310.5,-523.5
  text "COMPONENTS MARKED 'DNP' SHOULD NOT BE POPULATED." at 6102,-318 h60
  text "COMPONENTS MARKED 'DNP' SHOULD NOT BE POPULATED." at 6103,-317.5 h60
  text ".VariantName" at 5058,-434 h60
  text ".VariantName" at 5059,-433.5 h60
  text "ASSEMBLY VARIANT:" at 6097,-434 h60
  text "ASSEMBLY VARIANT:" at 6098,-433.5 h60
  text ".VersionControl_RevNumber" at 1035.5,-656.17 h60
  text ".VersionControl_RevNumber" at 1036.5,-655.67 h60
  text "SVN REV:" at 1541.5,-656.17 h60
  text "SVN REV:" at 1542.5,-655.67 h60
  text ".PCB_Rev" at 2088,-656.17 h60
  text ".PCB_Rev" at 2089,-655.67 h60
  text "REV:" at 2379.5,-656.17 h60
  text "REV:" at 2380.5,-655.67 h60
  text ".PRJ_Number" at 3224,-656.17 h60
  text ".PRJ_Number" at 3225,-655.67 h60
  text "BOARD #:" at 3769.5,-656.17 h60
  text "BOARD #:" at 3770.5,-655.67 h60
  text "PCB VIEWED FROM BOTTOM SIDE" at 6246,-656.17 h60
  text "PCB VIEWED FROM BOTTOM SIDE" at 6247,-655.67 h60
  text ".TID" at 3225,-859 h60
  text "TID #:" at 3770.5,-859 h60
  text ".TID" at 3224,-859.5 h60
  text "TID #:" at 3769.5,-859.5 h60
  text "TEXAS INSTRUMENTS" at 905.5,-1064.34 h60
  text ".Print_Time" at 2170,-1064.34 h60
  text ".Print_Date" at 2899,-1064.34 h60
  text "GENERATED    :" at 3768.5,-1064.34 h60
  text ".plot_File_Name" at 5441.5,-1064.34 h60
  text "PLOT NAME =" at 6247,-1064.34 h60
  text "TEXAS INSTRUMENTS" at 904.5,-1064.84 h60
  text ".Print_Time" at 2169,-1064.84 h60
  text ".Print_Date" at 2898,-1064.84 h60
  text "GENERATED    :" at 3767.5,-1064.84 h60
  text ".plot_File_Name" at 5440.5,-1064.84 h60
  text "PLOT NAME =" at 6246,-1064.84 h60
Mechanical 9:
  drawing of 57 lines, arcs and shapes, not listed
  text "1" at 739.84,8036.5 h70
  text "2" at 3235.5,8036.5 h70
  text "3" at 5724.84,8036.5 h70
  text "4" at 8231.51,8036.5 h70
  text "5" at 10730.5,8036.5 h70
  text "6" at 13235.5,8036.5 h70
  text "A" at -416.5,6893.5 h70
  text "A" at 14383.5,6893.5 h70
  text "B" at -416.5,4513.5 h70
  text "B" at 14383.5,4513.5 h70
  text "C" at -416.5,2138.5 h70
  text "C" at 14383.5,2138.5 h70
  text "PROJECT TITLE:" at 11343.5,277.5 h45
  text ".PRJ_Title" at 11393.5,144.17 h70
  text "DESIGNED FOR:" at 11343.5,-23.5 h45
  text ".PRJ_Customer" at 11393.5,-163.5 h70
  text "D" at -416.5,-231.5 h70
  text "D" at 14383.5,-231.5 h70
  text "FILE NAME:" at 11343.5,-323.5 h45
  text ".PCB_File_Name_No_Path" at 11393.5,-443.5 h70
  text "Texas Instruments (TI) and/or its licensors do not warrant the accuracy or completeness of this specification" at 6374,-605.34 h45
  text "ENGINEER:" at 11343.5,-613.5 h45
  text "LAYOUT BY:" at 12848.5,-613.5 h45
  text "or any information contained therein. TI and/or its licensors do not warrant that this design will meet" at 6329.01,-718 h45
  text ".PRJ_Engineer" at 11393.5,-768.49 h70
  text ".PCB_Layout" at 12899,-768.49 h70
  text "the specifications, will be suitable for your application or fit for any particular purpose, or will operate in" at 6329.01,-830.67 h45
  text ".Layer_Name" at 577,-858.49 h60
  text "ALTIUM DESIGNER VERSION:" at 12848.5,-923.5 h45
  text "an implementation. TI and/or its licensors do not warrant that the design is production worthy. You should" at 6329.01,-943.33 h45
  text "completely validate and test your design implementation to confirm the system functionality for your application." at 6374,-1056 h45
  text ".print_Scale" at 11393.5,-1056.83 h70
  text ".Application_BuildNumber" at 12899,-1056.83 h70
  text "1" at 739.84,-1263.5 h70
  text "2" at 3235.5,-1263.5 h70
  text "3" at 5724.84,-1263.5 h70
  text "4" at 8231.51,-1263.5 h70
  text "5" at 10730.5,-1263.5 h70
  text "6" at 13235.5,-1263.5 h70
Mechanical 10:
  drawing of 173 lines, arcs and shapes, not listed
  text "DESIGN INFORMATION" at 12377.02,6201 h60
  text "MIN. TRACK WIDTH:" at 11732.46,6021 h60
  text "8" at 12828.7,6021 h60
  text "MIL" at 12983.46,6021 h60
  text "MIN. CLEARANCE:" at 11732.46,5889 h60
  text "0.2" at 12768.7,5889 h60
  text "mm" at 12983.46,5889 h60
  text "MIN. VIA PAD SIZE:" at 11732.46,5757 h60
  text "24" at 12798.71,5757 h60
  text "MIL" at 12983.46,5757 h60
  text "0.05mm (2MIL)" at 12427.46,5615.29 h60
  text "MINIMUM ANNULAR RING" at 11403.23,5611 h60
  text "EXTERNAL" at 13135.46,5611 h60
  text "PER" at 11603.23,5493 h60
  text "IPC-D-275 CLASS 2 LEVEL C" at 11823.23,5493 h60
  text "MIL, HOLES" at 13311.46,5380.71 h60
  text "+/-" at 12919,5380 h60
  text "+/-" at 13773,5380 h60
  text "REGISTRATION TOLERANCES:" at 11403.23,5375 h60
  text "METAL" at 12603,5375 h60
  text "5" at 13179.2,5375 h60
  text "3" at 14012.2,5375 h60
  text "MIL" at 14128.46,5375 h60
  text "+/-" at 13773,5262 h60
  text "HOLE SIZE TOLERANCE (UNLESS OTHERWISE SPECIFIED):" at 11403.23,5257 h60
  text "3" at 14012.2,5257 h60
  text "MIL" at 14128.46,5257 h60
  text "MATERIAL:" at 11328.46,5047.54 h60
  text "FR-4 High Tg" at 12314.9,4907.21 h60
  text "FR-408" at 11749.46,4898.64 h60
  text "OTHER" at 13237.46,4898.64 h60
  text "X" at 12160,4895 h60
  text "62 MIL (1.6mm) +/-10%" at 12069.56,4735.92 h60
  text "THICKNESS:" at 11403.23,4731.64 h60
  text "X" at 11941.4,4731.64 h60
  text "OTHER" at 13354.46,4731.64 h60
  text "TOLERANCE:" at 11403.23,4573.64 h60
  text "X" at 12242.53,4573.64 h60
  text "ANSI IPC-6012 TYPE 3 CLASS 2" at 12429.48,4573.64 h60
  text "OTHER +/-" at 12429.46,4417.64 h60
  text "BOW & TWIST:" at 11403.23,4260.64 h60
  text "X" at 12242.53,4260.64 h60
  text "ANSI IPC-6012 TYPE 3 CLASS 2" at 12429.48,4260.64 h60
  text "OTHER +/-" at 12429.46,4102.13 h60
  text "DRILLING:" at 11328.46,3963.64 h60
  text "REFERENCE:" at 11403.23,3846.64 h60
  text "X" at 12051.46,3846.64 h60
  text "AS SHOWN" at 12238.46,3846.64 h60
  text "X" at 12952.46,3846.64 h60
  text "NC_DRILL FILES" at 13089.46,3846.64 h60
  text "PTH COPPER THICKNESS:" at 11403.23,3688.64 h60
  text "X" at 12533.46,3688.64 h60
  text "20-30 um" at 12670.46,3688.64 h60
  text "OTHER" at 13387.46,3688.64 h60
  text "BOARD FINISH:" at 11328.46,3529.64 h60
  text "SILKSCREEN:" at 11483.68,3411.64 h60
  text "X" at 12432.46,3411.64 h60
  text "TOP" at 12558.46,3411.64 h60
  text "X" at 12942.46,3411.64 h60
  text "BOTTOM" at 13069.46,3411.64 h60
  text "SILKSCREEN COLOR:" at 11483.68,3244.64 h60
  text "X" at 12431.42,3244.64 h60
  text "WHITE" at 12558.46,3244.64 h60
  text "OTHER" at 13069.46,3244.64 h60
  text "X" at 12562.42,3085.44 h60
  text "GREEN" at 12689.46,3085.44 h60
  text "OTHER" at 13307.46,3085.44 h60
  text "SOLDER RESIST COLOR:" at 11483.68,3074.64 h60
  text "X" at 12562.42,2915.44 h60
  text "MATTE" at 12689.46,2915.44 h60
  text "SEMI-GLOSS" at 13307,2914.8 h60
  text "IMMERSION GOLD (ENIG)" at 12389.46,2726.92 h60
  text "ENEPIG" at 13727,2723.64 h60
  text "SURFACE FINISH:" at 11328.46,2722.64 h60
  text "X" at 12202.51,2722.64 h60
  text "IMM. TIN/SILVER OR EQUIV" at 11658,2565.64 h60
  text "OTHER" at 13089.46,2565.64 h60
  text "ARRAY/PANEL:" at 11328.46,2386.64 h60
  text "CUT AND TRIM PER M1 BOARD OUTLINE" at 12389.46,2382.35 h60
  text "N.C. ROUTE" at 12389.46,2230.64 h60
  text "X" at 13068.46,2230.64 h60
  text "V. SCORE" at 13255.46,2230.64 h60
  text "CERTIFICATION:" at 11328.46,2093.64 h60
  text "MATERIALS AND WORKMANSHIP FOR ALL PCBS" at 12053.46,2093.64 h60
  text "TO MEET OR EXCEED THE REQUIREMENTS OF:" at 12053.46,1995.64 h60
  text "X" at 11679.96,1859.13 h60
  text "ANSI IPC-A-600F CLASS ->" at 11818.96,1859.13 h60
  text "X" at 13458.02,1859.13 h60
  text "2" at 13576.96,1859.14 h60
  text "1" at 13261.96,1857.64 h60
  text "3" at 13930.96,1857.64 h60
  text "X" at 12494.02,1699.64 h60
  text "RoHS" at 12630.96,1699.64 h60
  text "OTHER" at 13275.36,1699.64 h60
  text "PER ORDER" at 13672.42,1699.64 h60
  text "ALL BOARDS MUST MEET OR EXCEED UL94-V0 REQUIREMENTS." at 11356,1534 h60
  text "PCB MUST BEAR THE UL94V-0 UL REGISTERED MATERIAL ID NUMBER" at 11356,1414 h60
  text "ADDITIONAL REQUIREMENTS:" at 11328.46,1240.64 h60
  text "MICROSECTION:" at 11403.23,1125.64 h60
  text "YES" at 12308.96,1125.64 h60
  text "REQUIRED" at 13170.46,969.49 h60
  text "BARE BOARD ELEC. TEST:" at 11403.23,966.64 h60
  text "NONE" at 12708.96,966.64 h60
  text "X" at 13043.46,966.64 h60
  text "PER ORDER" at 13762.46,966.64 h60
  text ".Layer_Name" at 578,-857.99 h60
  text ".Layer_Name" at 578,-857.99 h60
Mechanical 11:
  lines w10: -292,-930.17 6308,-930.17 ; -292,-726.83 6310,-726.83 ; -292,-523.5 -292,-1133.5 3713,-1133.5 6310,-1133.5 6310,-523.5 -291.5,-523.5 -291.5,-1133.5 1284,-1133.5 ; -291,-929.67 6309,-929.67 ; -291,-726.33 6311,-726.33 ; -291,-523 -291,-1133 3714,-1133 6311,-1133 6311,-523 -290.5,-523 -290.5,-1133 1285,-1133 ; 2173,-1133.5 2173,-523.5 ; 2174,-1133 2174,-523 ; 3440,-726.83 3440,-523.5 ; 3441,-726.33 3441,-523 ; 4280,-726.83 4280,-523.5 ; 4281,-726.33 4281,-523 ; 4902,-1140 4902,-937.17 ; 4903,-1139.5 4903,-936.67
  text "ALL ARTWORK VIEWED FROM TOP SIDE" at -227.5,-655.17 h60
  text "BOARD #:" at 2249,-655.17 h60
  text ".PRJ_Number" at 2794.5,-655.17 h60
  text "REV:" at 3639,-655.17 h60
  text ".PCB_Rev" at 3930.5,-655.17 h60
  text "SVN REV:" at 4477,-655.17 h60
  text ".VersionControl_RevNumber" at 4983,-655.17 h60
  text "ALL ARTWORK VIEWED FROM TOP SIDE" at -228.5,-655.67 h60
  text "BOARD #:" at 2248,-655.67 h60
  text ".PRJ_Number" at 2793.5,-655.67 h60
  text "REV:" at 3638,-655.67 h60
  text ".PCB_Rev" at 3929.5,-655.67 h60
  text "SVN REV:" at 4476,-655.67 h60
  text ".VersionControl_RevNumber" at 4982,-655.67 h60
  text "LAYER NAME =" at -227.5,-857.99 h60
  text "TID #:" at 2248,-859 h60
  text "TID #:" at 2249,-858.5 h60
  text ".TID" at 2793.5,-859 h60
  text ".TID" at 2794.5,-858.5 h60
  text "PLOT NAME =" at -228.5,-1064.34 h60
  text "PLOT NAME =" at -227.5,-1063.84 h60
  text ".plot_File_Name" at 577,-1064.34 h60
  text ".plot_File_Name" at 578,-1063.84 h60
  text "GENERATED    :" at 2250,-1064.34 h60
  text "GENERATED    :" at 2251,-1063.84 h60
  text ".Print_Date" at 3119.5,-1064.34 h60
  text ".Print_Date" at 3120.5,-1063.84 h60
  text ".Print_Time" at 3848.5,-1064.34 h60
  text ".Print_Time" at 3849.5,-1063.84 h60
  text "TEXAS INSTRUMENTS" at 5113,-1064.34 h60
  text "TEXAS INSTRUMENTS" at 5114,-1063.84 h60
Mechanical 12:
  drawing of 191 lines, arcs and shapes, not listed
  text "Layer" at 9790.34,7830 h60
  text "Name" at 10200.26,7830 h60
  text "Material" at 11130,7830 h60
  text "Thickness" at 11989.77,7830 h60
  text "Constant" at 12639.6,7830 h60
  text "Board Layer Stack" at 13209.46,7830 h60
  text "1" at 9790.34,7710 h60
  text "Top Overlay" at 10200.26,7710 h60
  text "2" at 9790.34,7590 h60
  text "Top Solder" at 10200.26,7590 h60
  text "Solder Resist" at 11130,7590 h60
  text "0.40mil" at 11989.77,7590 h60
  text "3.5" at 12639.6,7590 h60
  text "3" at 9790.34,7470 h60
  text "Top Layer" at 10200.26,7470 h60
  text "Copper" at 11130,7470 h60
  text "1.40mil" at 11989.77,7470 h60
  text "4" at 9790.34,7350 h60
  text "Dielectric1" at 10200.26,7350 h60
  text "FR-4" at 11130,7350 h60
  text "59.20mil" at 11989.77,7350 h60
  text "4.8" at 12639.6,7350 h60
  text "5" at 9790.34,7230 h60
  text "Bottom Layer" at 10200.26,7230 h60
  text "Copper" at 11130,7230 h60
  text "1.40mil" at 11989.77,7230 h60
  text "6" at 9790.34,7110 h60
  text "Bottom Solder" at 10200.26,7110 h60
  text "Solder Resist" at 11130,7110 h60
  text "0.40mil" at 11989.77,7110 h60
  text "3.5" at 12639.6,7110 h60
  text "7" at 9790.34,6990 h60
  text "Bottom Overlay" at 10200.26,6990 h60
  text ".Layer_Name" at 578,-857.99 h60
  text ".Layer_Name" at 578,-857.99 h60
Mechanical 13:
  text ".Layer_Name" at 578,-857.99 h60
  text ".Layer_Name" at 578,-857.99 h60
Mechanical 14:
  text ".Layer_Name" at 578,-857.99 h60
  text ".Layer_Name" at 578,-857.99 h60
Mechanical 15:
  text ".Layer_Name" at 578,-857.99 h60
  text ".Layer_Name" at 578,-857.99 h60
Mechanical 16:
  text ".Layer_Name" at 578,-857.99 h60
  text ".Layer_Name" at 578,-857.99 h60
Drill Drawing:
  text ".Layer_Name" at 578,-857.99 h60

## Dimensions
1,-399.5 to 1001,-399.5 on Mechanical 2
0,0 to 0,2000 on Mechanical 2
0,0 to 1800,0 on Mechanical 2
0,-400 to 1000,-400 on Mechanical 2

## Text inside footprints (layer, text, board x,y; h text height)
Logo2: Top Overlay "Pb" at 1540.4,661.1 h60